# Altium PCB PCB.PcbDoc (part 2 of 2)
Units mm, origin at the board's own origin, x right, y up, seen from the top; angles counter-clockwise.
Board outline 99.99 x 64.99 mm, 4 copper layers (Top Layer 1, Top Layer, Bottom Layer, Bottom Layer 1), stack 1.483 mm thick; 158 components, 106 nets, 655 pads, 492 vias.
Unrouted connection lines stored in the file: 12.
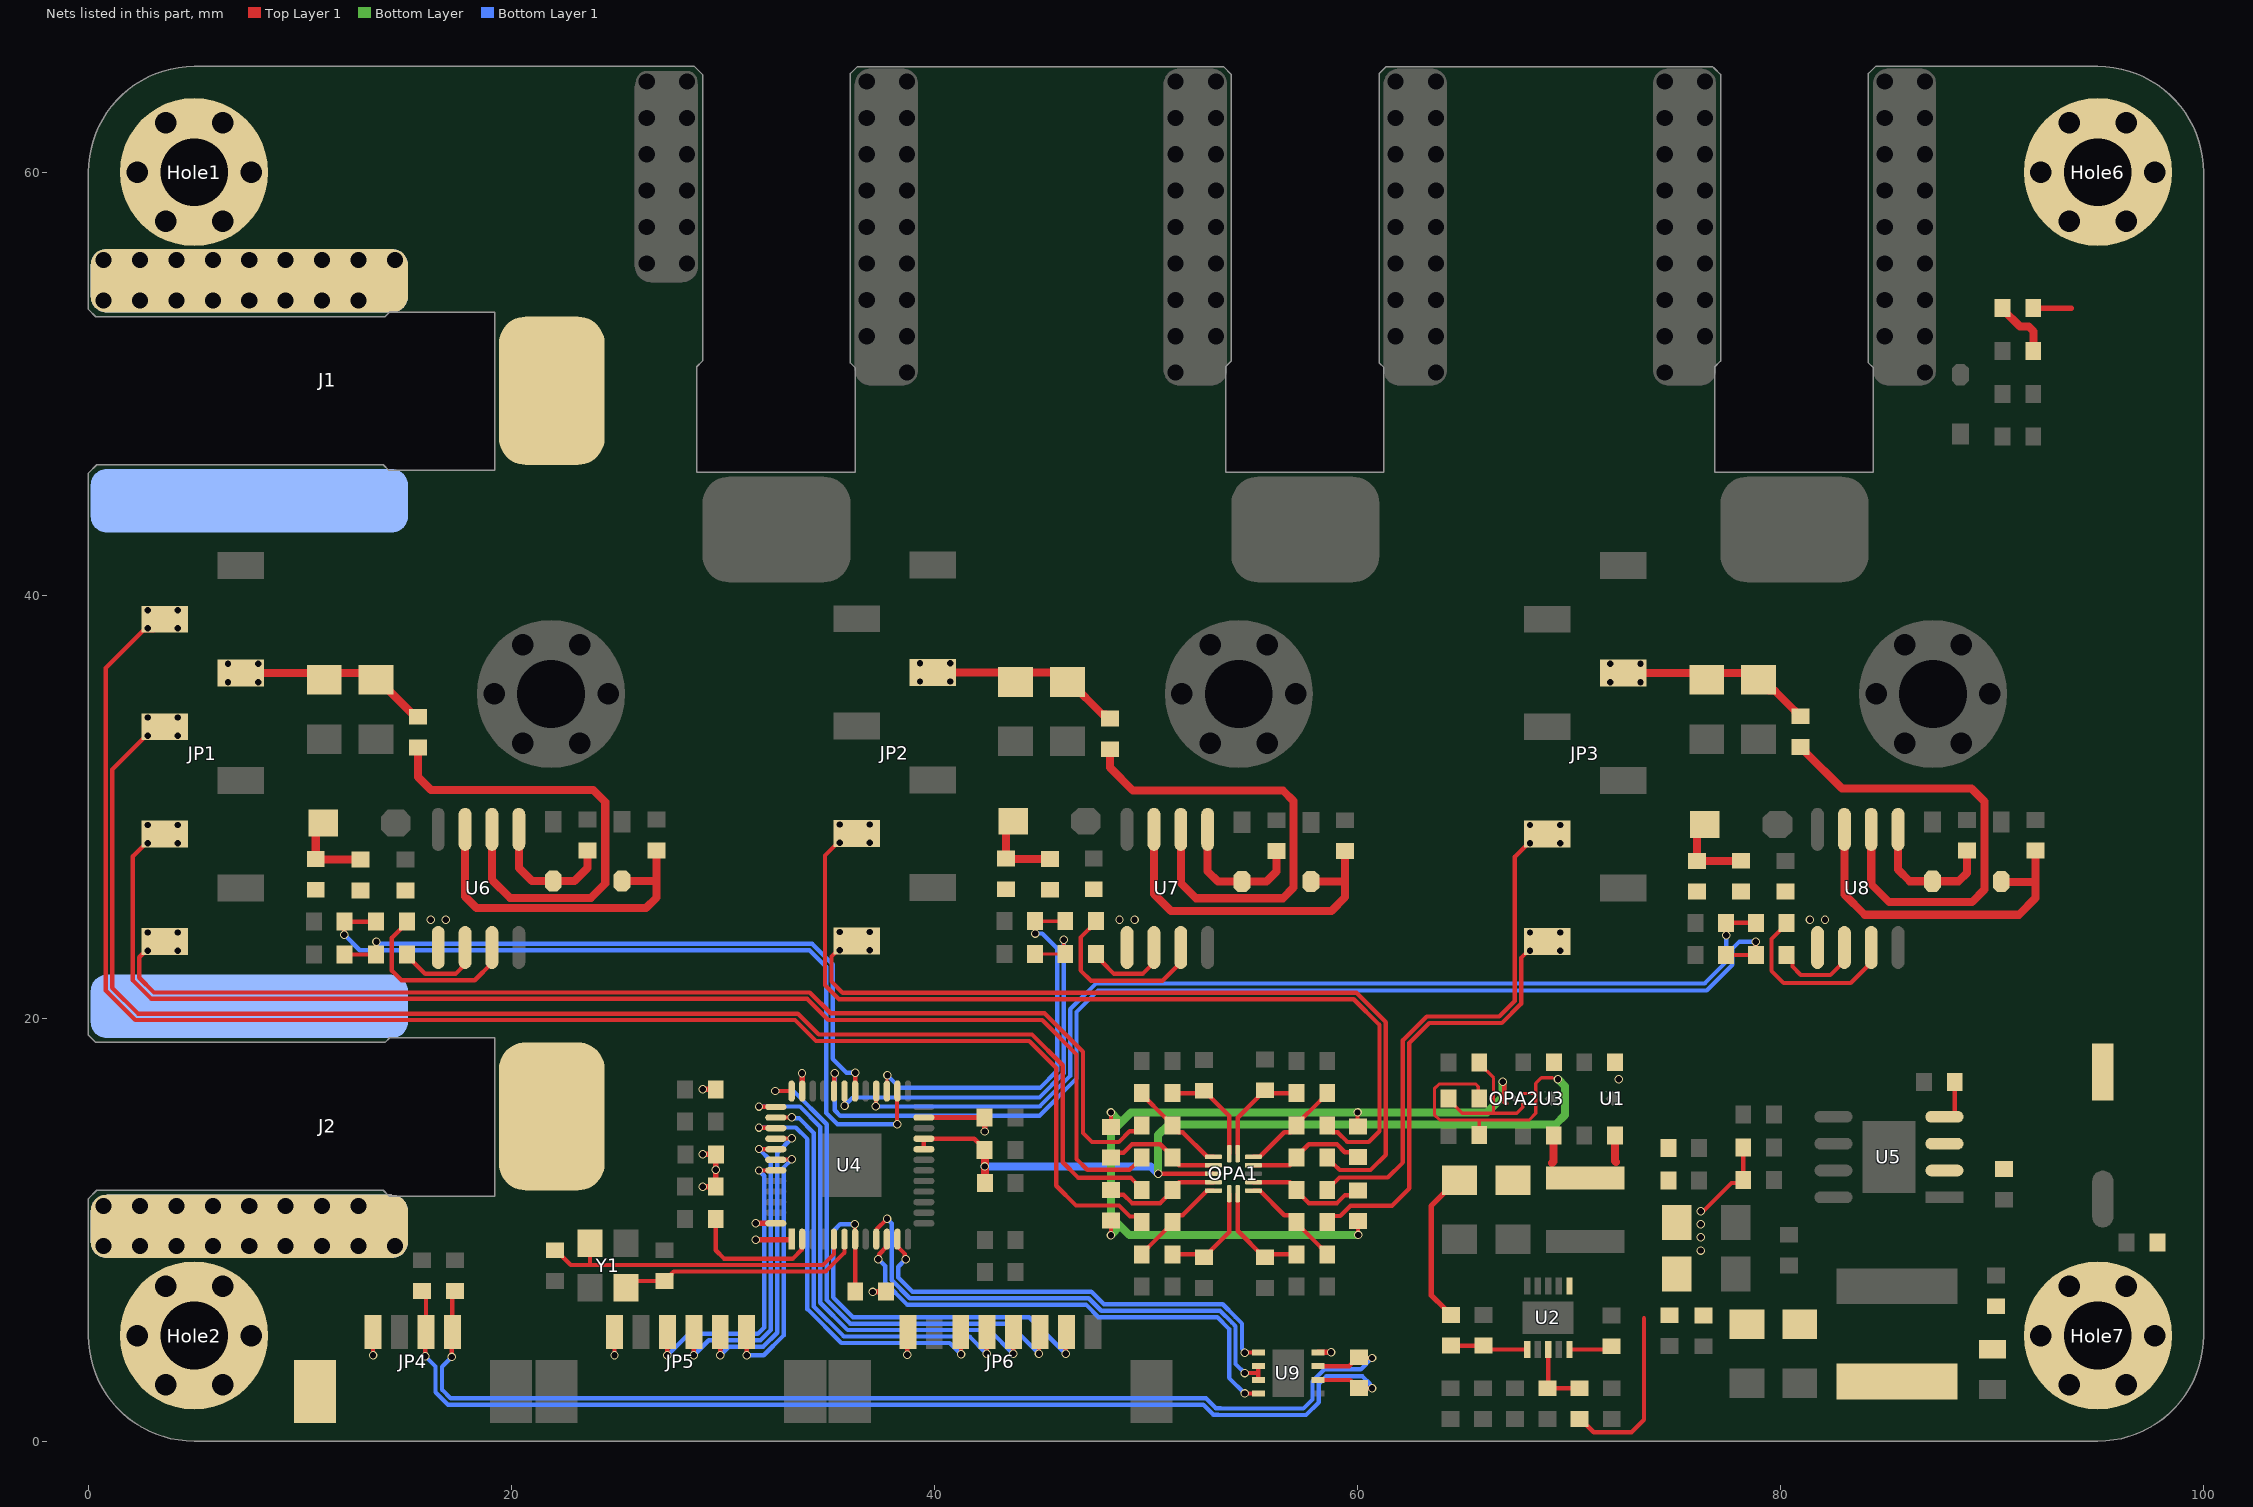
[diagram p4: the nets of this part, all layers, seen from the top]

## Via types
v1: diameter 0.4, hole 0.3, Top Layer 1 to Bottom Layer 1, tented both sides, 372 vias
v2: diameter 1, hole 0.711, Top Layer 1 to Bottom Layer 1, tented both sides, 120 vias

## Nets (pads, with @x,y where several pads share a name; then routed paths per layer and width w, separated by ;. In a path a pad name is that pad's centre, name@x,y a point inside that pad or via, vN(x,y) a via of type N, cw(c..) or ccw(c..) an arc to the next point about the centre after c; other vN are vias at no path point) (continued)
NetD1_1: D1.1 R7.2 R15.2 | length 4
  Top Layer 1 w0.381: D1.1@11.1,29.224 10.744,28.868 R15.2@10.744,27.522 10.757,27.509 12.84,27.509 R7.2@12.852,27.497
NetD2_1: D2.1 R14.2 R16.2 | length 4
  Top Layer 1 w0.381: D2.1@43.726,29.312 43.383,28.969 R16.2@43.383,27.547 43.396,27.535 45.453,27.535 R14.2@45.466,27.522
NetD3_2: D3.2 R21.1 U6.7 | length 16.5
  Top Layer 1 w0.381: U6.7@17.805,28.931 17.805,25.756 18.35,25.211 26.361,25.211 26.848,25.698 26.848,26.441 ; D3.2@25.222,26.486 26.803,26.486 26.848,26.441 ; R21.1@26.848,27.938 26.848,26.441
NetD4_2: D4.2 R22.1 U7.7 | length 16.5
  Top Layer 1 w0.381: U7.7@50.368,28.931 50.368,25.876 51.174,25.07 58.756,25.07 59.411,25.725 59.411,26.467 ; D4.2@57.785,26.461 59.405,26.461 59.411,26.467 ; R22.1@59.411,27.912 59.411,26.467
NetD5_2: D5.2 R29.1 U6.5 | length 6.4
  Top Layer 1 w0.381: U6.5@20.345,28.931 20.345,27.102 20.961,26.486 D5.2@21.971,26.486 22.981,26.486 23.597,27.102 R29.1@23.597,27.938
NetD6_2: D6.2 R30.1 U7.5 | length 6.6
  Top Layer 1 w0.381: U7.5@52.908,28.931 52.908,26.949 53.394,26.464 D6.2@54.534,26.464 55.684,26.464 56.159,26.939 R30.1@56.159,27.912
NetD7_1: D7.1 R31.2 R61.2 | length 4
  Top Layer 1 w0.381: D7.1@76.418,29.159 76.05,28.791 R31.2@76.05,27.434 76.056,27.44 78.125,27.44 R61.2@78.13,27.446
NetD8_2: D8.2 R34.1 U8.7 | length 16.7
  Top Layer 1 w0.381: U8.7@83.009,28.931 83.009,25.855 83.972,24.892 91.262,24.892 92.05,25.679 92.05,26.441 ; D8.2@90.424,26.472 90.455,26.441 92.05,26.441 ; R34.1@92.05,27.924 92.05,26.441
NetD9_2: D9.2 R38.1 U8.5 | length 6.6
  Top Layer 1 w0.381: U8.5@85.549,28.931 85.549,27.023 86.098,26.475 88.405,26.475 88.798,26.869 R38.1@88.798,27.924
NetOPA1_1: OPA1.1 R42.1 R43.1 | length 4.7
  Top Layer 1 w0.203: R43.1@49.796,16.459 49.796,16.409 50.946,15.259 50.972,15.259 51.246,14.985 R42.1@51.246,14.935 51.246,14.885 51.519,14.612 51.725,14.612 52.887,13.449 OPA1.1@53.182,13.449
NetOPA1_2: OPA1.2 R39.1 R40.1 | length 5.6
  Top Layer 1 w0.203: R39.1@48.336,13.411 48.564,13.639 48.933,13.639 49.334,14.039 50.667,14.039 51.246,13.461 R40.1@51.246,13.411 51.246,13.361 51.558,13.049 OPA1.2@53.182,13.049
NetOPA1_4: OPA1.4 R44.1 R45.1 | length 5.6
  Top Layer 1 w0.203: R44.1@48.336,11.887 48.564,11.66 48.933,11.66 49.334,11.259 50.667,11.259 51.246,11.837 R45.1@51.246,11.887 51.246,11.937 51.558,12.249 OPA1.4@53.182,12.249
NetOPA1_5: OPA1.5 R47.1 R48.1 | length 4.7
  Top Layer 1 w0.203: R48.1@49.796,8.839 49.796,8.889 50.069,9.163 50.095,9.163 51.246,10.313 R47.1@51.246,10.363 51.246,10.413 51.519,10.687 51.725,10.687 52.887,11.849 OPA1.5@53.182,11.849
NetOPA1_6: OPA1.6 R46.2 R48.2 | length 5.1
  Top Layer 1 w0.203: R48.2@51.246,8.839 52.642,8.839 52.78,8.701 53.054,8.974 53.054,9.024 53.927,9.898 OPA1.6@53.927,11.704
NetOPA1_7: OPA1.7 R51.2 R53.2 | length 5.1
  Top Layer 1 w0.203: OPA1.7@54.327,11.704 54.327,9.949 55.576,8.701 55.715,8.839 R53.2@57.111,8.839
NetOPA1_8: OPA1.8 R52.1 R53.1 | length 4.8
  Top Layer 1 w0.203: OPA1.8@55.072,11.849 55.367,11.849 56.53,10.687 56.837,10.687 57.111,10.413 R52.1@57.111,10.363 57.111,10.313 58.261,9.163 58.287,9.163 58.561,8.889 R53.1@58.561,8.839
NetOPA1_9: OPA1.9 R49.1 R50.1 | length 5.7
  Top Layer 1 w0.203: OPA1.9@55.072,12.249 56.799,12.249 57.111,11.937 R50.1@57.111,11.887 57.111,11.837 57.689,11.259 59.02,11.259 59.398,11.637 59.795,11.637 R49.1@60.02,11.862
NetOPA1_11: OPA1.11 R54.1 R55.1 | length 5.7
  Top Layer 1 w0.203: OPA1.11@55.072,13.049 56.799,13.049 57.111,13.361 57.111,13.461 57.689,14.039 59.02,14.039 59.391,13.669 59.788,13.669 R54.1@60.02,13.437
NetOPA1_12: OPA1.12 R57.1 R58.1 | length 4.8
  Top Layer 1 w0.203: OPA1.12@55.072,13.449 55.367,13.449 56.53,14.612 56.837,14.612 57.111,14.885 R57.1@57.111,14.935 57.111,14.985 58.261,16.136 58.287,16.136 58.561,16.409 R58.1@58.561,16.459
NetOPA1_13: OPA1.13 R56.2 R58.2 | length 5.1
  Top Layer 1 w0.203: OPA1.13@54.327,13.594 54.327,15.299 55.303,16.274 55.303,16.324 55.576,16.598 R56.2@55.626,16.598 55.765,16.459 R58.2@57.111,16.459
NetOPA1_14: OPA1.14 R41.2 R43.2 | length 5
  Top Layer 1 w0.203: R43.2@51.246,16.459 52.617,16.459 R41.2@52.73,16.572 52.78,16.572 53.054,16.299 53.054,16.249 53.927,15.375 OPA1.14@53.927,13.594
NetOPA2_4: OPA2.4 R59.2 R60.1 | length 6.8
  Top Layer 1 w0.152: R59.2@64.299,16.205 64.299,16.155 64.947,15.507 66.235,15.507 66.302,15.507 66.427,15.507 ; R60.1@65.749,17.907 65.749,17.857 66.427,17.179 66.427,15.507 ; OPA2.4@67.802,15.965 67.802,15.785 67.524,15.507 66.427,15.507
NetR2_1: R2.1 U5.4 | length 2
  Top Layer 1 w0.203: U5.4@87.74,15.342 88.068,15.342 88.228,15.502 R2.1@88.228,16.993
NetR3_2: R3.2 R4.1 | length 2.9
  Top Layer 1 w0.381: R3.2@90.486,53.569 90.486,53.519 91.306,52.698 91.725,52.698 91.948,52.475 91.948,51.548 R4.1@91.936,51.537
NetR8_2: R8.2 R11.1 U2.8 | length 3.3
  Top Layer 1 w0.203: U2.8@69.012,4.292 69.012,2.556 R11.1@68.964,2.508 R8.2@70.488,2.508
NetR12_1: R12.1 U2.10 | length 2.1
  Top Layer 1 w0.203: U2.10@70.012,4.339 71.852,4.339 R12.1@72.009,4.496
NetR19_2: R19.2 U6.2 | length 4.1
  Top Layer 1 w0.203: R19.2@15.051,23.012 15.051,22.962 15.324,22.689 15.331,22.689 15.922,22.098 17.348,22.098 17.805,22.555 U6.2@17.805,23.343
NetR20_2: R20.2 U7.2 | length 4.1
  Top Layer 1 w0.203: R20.2@47.627,23.038 47.901,22.764 47.901,22.682 48.485,22.098 49.835,22.098 50.368,22.631 U7.2@50.368,23.343
NetR23_1: R23.1 U6.6 | length 23
  Top Layer 1 w0.381: R23.1@15.57,32.803 15.57,31.411 16.188,30.793 23.863,30.793 24.43,30.226 24.43,26.363 23.76,25.694 19.924,25.694 19.075,26.543 U6.6@19.075,28.931
NetR24_1: R24.1 U7.6 | length 22.7
  Top Layer 1 w0.381: R24.1@48.285,32.715 48.285,31.852 49.381,30.756 56.48,30.756 56.972,30.264 56.972,26.18 56.464,25.672 52.363,25.672 51.638,26.397 U7.6@51.638,28.931
NetR25_2: R25.2 U6.3 | length 8.6
  Top Layer 1 w0.203: R25.2@15.051,24.562 15.051,24.512 14.339,23.8 14.339,22.252 14.797,21.793 18.263,21.793 19.075,22.606 U6.3@19.075,23.343
NetR26_2: R26.2 U7.3 | length 8.6
  Top Layer 1 w0.203: R26.2@47.627,24.587 47.627,24.537 46.902,23.812 46.902,22.262 47.396,21.768 50.775,21.768 51.638,22.631 U7.3@51.638,23.343
NetR33_2: R33.2 U8.2 | length 4.2
  Top Layer 1 w0.203: R33.2@80.28,22.987 80.553,22.714 80.553,22.444 80.95,22.047 82.347,22.047 83.009,22.71 U8.2@83.009,23.343
NetR35_1: R35.1 U8.6 | length 22.5
  Top Layer 1 w0.381: R35.1@80.924,32.828 80.974,32.828 81.159,32.644 81.159,32.594 82.892,30.861 89.027,30.861 89.637,30.251 89.637,26.086 89.037,25.486 85.131,25.486 84.279,26.338 U8.6@84.279,28.931
NetR36_2: R36.2 U8.3 | length 7.9
  Top Layer 1 w0.203: R36.2@80.28,24.511 80.28,24.461 79.563,23.744 79.563,22.24 80.137,21.666 83.312,21.666 84.252,22.606 U8.3@84.277,22.606
NRST: JP6.7 R64.2 U4.7 | length 20.6
  Top Layer 1 w0.203: v1(36.226,10.266) 36.234,10.258 36.234,9.563 U4.7@36.242,9.556 36.242,7.167 R64.2@36.297,7.112 ; v1(46.203,4.14) 46.203,5.133 JP6.7@46.235,5.166
  Bottom Layer 1 w0.203: v1(36.226,10.266) 35.539,10.266 35.204,9.931 35.204,6.805 36.142,5.867 44.475,5.867 v1(46.203,4.14)
PGND: Hole2.1 J2.1 JP4.0@10.71,2.355
RS485_A: C40.2 JP4.3 R62.1 U9.6 | length 54
  Top Layer 1 w0.203: C40.2@15.773,7.112 15.953,6.933 JP4.3@15.953,5.166 15.926,5.139 v1(15.926,4.013) ; U9.6@58.131,2.901 59.647,2.901 R62.1@59.995,2.552 ; R62.1@60.071,2.526 60.083,2.515 v1(60.681,2.515)
  Bottom Layer 1 w0.203: v1(15.926,4.013) 15.926,4.011 16.405,3.532 16.405,2.316 16.994,1.727 52.706,1.727 53.172,1.261 53.4,1.261 53.416,1.245 57.56,1.245 58.165,1.85 58.165,2.718 58.515,3.068 60.233,3.068 60.582,2.719 60.582,2.666 60.681,2.568 v1(60.681,2.515)
RS485_B: C39.1 JP4.4 R62.2 U9.7 | length 53.4
  Top Layer 1 w0.203: v1(17.17,3.988) 17.17,5.133 JP4.4@17.203,5.166 17.203,6.992 C39.1@17.323,7.112 ; U9.7@58.131,3.551 59.596,3.551 59.906,3.861 R62.2@60.046,3.861 ; R62.2@60.071,3.976 60.11,3.937 v1(60.681,3.937)
  Bottom Layer 1 w0.203: v1(17.17,3.988) 17.17,3.985 16.709,3.524 16.709,2.442 17.12,2.032 52.832,2.032 53.298,1.566 53.526,1.566 53.542,1.55 57.434,1.55 57.86,1.976 57.86,2.845 58.425,3.409 60.153,3.409 v1(60.681,3.937)
Shunt_BusH: JP1.5 R45.2 | length 69
  Top Layer 1 w0.203: JP1.5@3.607,33.782 3.142,33.782 1.12,31.76 1.12,21.435 2.337,20.218 33.528,20.218 34.519,19.228 44.603,19.228 46.057,17.774 46.057,13.193 46.784,12.465 49.267,12.465 49.796,11.937 R45.2@49.796,11.887
  other v1: 2.794,33.35 4.219,33.35 2.794,34.214 4.219,34.214
Shunt_BusL: JP1.7 R47.2 | length 75.8
  Top Layer 1 w0.203: JP1.7@3.607,38.862 3.073,38.329 2.591,38.329 0.815,36.553 0.815,21.309 1.372,20.752 2.211,19.914 33.402,19.914 34.393,18.923 44.476,18.923 45.752,17.647 45.752,17.393 ; 45.752,17.39 45.752,12.082 46.686,11.148 48.719,11.148 49.237,10.63 49.529,10.63 R47.2@49.796,10.363
  other v1: 2.794,38.43 4.219,38.43 2.794,39.294 4.219,39.294
Shunt_UH: JP1.3 R40.2 | length 62.4
  Top Layer 1 w0.203: JP1.3@3.607,28.702 3.142,28.702 2.098,27.658 2.098,21.79 2.721,21.166 2.973,20.914 33.976,20.914 34.977,19.914 45.085,19.914 46.711,18.288 46.711,13.339 47.217,12.833 49.217,12.833 49.472,13.088 49.522,13.088 49.796,13.361 R40.2@49.796,13.411
  other v1: 2.794,28.27 4.219,28.27 2.794,29.134 4.219,29.134
Shunt_UL: JP1.1 R42.2 | length 55.7
  Top Layer 1 w0.203: JP1.1@2.752,23.232 2.403,22.883 2.403,21.916 3.099,21.219 34.102,21.219 35.087,20.234 45.196,20.234 47.015,18.414 47.015,14.572 47.439,14.148 48.71,14.148 49.219,14.656 49.522,14.656 49.796,14.93 R42.2@49.796,14.985 ; v1(2.794,23.19) 3.175,23.19 JP1.1@3.607,23.622
  other v1: 4.219,23.19 2.794,24.054 4.219,24.054
Shunt_VH: JP2.1 R55.2 | length 39.3
  Top Layer 1 w0.203: JP2.1@36.322,23.647 35.857,23.647 35.123,22.914 35.123,21.733 35.653,21.203 59.944,21.203 61.333,19.813 61.333,13.549 60.607,12.822 59.15,12.822 58.884,13.088 58.834,13.088 58.561,13.361 R55.2@58.561,13.411
  other v1: 35.509,23.216 36.935,23.216 35.509,24.079 36.934,24.079
Shunt_VL: JP2.3 R57.2 | length 43.1
  Top Layer 1 w0.203: JP2.3@36.322,28.727 35.857,28.727 34.819,27.689 34.819,21.56 35.48,20.898 59.817,20.898 61.029,19.687 61.029,14.659 60.522,14.153 59.512,14.153 59.053,14.612 58.834,14.612 58.561,14.885 R57.2@58.561,14.935
  other v1: 35.509,28.296 36.935,28.296 35.509,29.159 36.934,29.159
Shunt_WH: JP3.3 R50.2 | length 24.8
  Top Layer 1 w0.203: R50.2@58.561,11.887 58.561,11.937 58.834,12.211 58.884,12.211 59.145,12.471 61.424,12.471 62.138,13.186 62.138,18.955 63.27,20.086 66.69,20.086 67.423,20.819 67.423,27.629 68.496,28.702 JP3.3@68.961,28.702
  other v1: 68.148,28.27 69.574,28.27 68.148,29.134 69.573,29.134
Shunt_WL: JP3.1 R52.2 | length 21.2
  Top Layer 1 w0.203: R52.2@58.561,10.363 58.561,10.381 58.834,10.655 59.176,10.655 59.66,11.139 61.624,11.139 62.443,11.958 62.443,18.829 63.385,19.771 66.817,19.771 67.728,20.682 67.728,22.854 68.496,23.622 JP3.1@68.961,23.622
  other v1: 68.148,23.19 69.574,23.19 68.148,24.054 69.573,24.054
SPI3_CS: JP5.3 U4.43 | length 14.5
  Top Layer 1 w0.203: v1(27.367,4.066) JP5.3@27.367,5.166 JP5.3@27.368,5.167 ; v1(31.699,12.802) 31.701,12.804 32.49,12.804 U4.43@32.492,12.806
  Bottom Layer 1 w0.203: v1(27.367,4.066) 28.379,5.078 31.642,5.078 31.947,5.383 31.947,12.553 v1(31.699,12.802)
SPI3_MISO: JP5.4 U4.41 | length 14.8
  Top Layer 1 w0.203: v1(28.617,4.066) JP5.4@28.617,5.166 JP5.4@28.618,5.167 ; v1(31.699,13.818) 31.705,13.812 32.486,13.812 U4.41@32.492,13.806
  Bottom Layer 1 w0.203: v1(28.617,4.066) 29.324,4.773 31.768,4.773 32.252,5.257 32.252,13.265 v1(31.699,13.818)
SPI3_MOSI: JP5.6 U4.42 | length 12.5
  Top Layer 1 w0.203: v1(31.115,4.064) 31.115,5.164 JP5.6@31.117,5.166 ; U4.42@32.492,13.306 32.507,13.32 33.234,13.32 v1(33.249,13.335)
  Bottom Layer 1 w0.203: v1(31.115,4.064) 31.921,4.064 32.862,5.004 32.862,12.948 v1(33.249,13.335)
SPI3_SCK: JP5.5 U4.40 | length 14.5
  Top Layer 1 w0.203: v1(29.867,4.066) JP5.5@29.867,5.166 JP5.5@29.867,5.166 ; U4.40@32.492,14.306 32.502,14.316 33.239,14.316 v1(33.249,14.326)
  Bottom Layer 1 w0.203: v1(29.867,4.066) 30.269,4.468 31.894,4.468 32.557,5.131 32.557,13.634 v1(33.249,14.326)
SumGND: C41.2 C42.2 Hole7.1 LB1.1
SWCLK: JP6.5 U4.37 | length 23.6
  Top Layer 1 w0.203: v1(31.699,15.824) 31.708,15.815 32.482,15.815 U4.37@32.492,15.806 ; v1(43.713,4.14) 43.713,5.144 JP6.5@43.735,5.166
  Bottom Layer 1 w0.203: v1(31.699,15.824) 33.63,15.824 34.595,14.859 34.595,6.552 35.889,5.258 42.596,5.258 v1(43.713,4.14)
SWDIO: JP6.6 U4.36 | length 24.3
  Top Layer 1 w0.203: v1(32.461,16.561) 33.237,16.561 U4.36@33.242,16.556 ; v1(44.933,4.14) 44.933,5.113 JP6.6@44.985,5.166
  Bottom Layer 1 w0.203: v1(32.461,16.561) 33.324,16.561 34.9,14.985 34.9,6.679 36.016,5.563 43.51,5.563 v1(44.933,4.14)
TIM1_BKIN: R65.2 U4.2 | length 6.4
  Top Layer 1 w0.203: R65.2@29.656,10.516 29.656,9.029 30.048,8.636 33.299,8.636 33.723,9.06 33.723,9.537 U4.2@33.742,9.556
TIM1_CH1: R17.1 R19.1 U4.30 | length 30.8
  Top Layer 1 w0.203: R17.1@12.104,23.012 R19.1@13.601,23.012 13.614,23.026 v1(13.614,23.622) ; U4.30@36.242,16.556 36.244,16.558 36.244,17.422 v1(36.246,17.424)
  Bottom Layer 1 w0.203: v1(13.614,23.622) 13.668,23.622 13.767,23.523 34.211,23.523 35.179,22.555 35.179,18.085 35.839,17.424 v1(36.246,17.424)
TIM1_CH1N: R25.1 R27.2 U4.26 | length 37.6
  Top Layer 1 w0.203: v1(12.09,23.952) 12.09,24.548 R27.2@12.104,24.562 R25.1@13.601,24.562 ; v1(38.227,14.988) 38.227,16.541 U4.26@38.242,16.556
  Bottom Layer 1 w0.203: v1(12.09,23.952) 12.825,23.218 34.085,23.218 34.874,22.429 34.874,15.519 35.405,14.988 v1(38.227,14.988)
TIM1_CH2: R18.1 R20.1 U4.31 | length 20.1
  Top Layer 1 w0.152: v1(35.742,15.867) U4.31@35.742,16.556 ; R18.1@44.755,23.038 R20.1@46.177,23.038 46.101,23.114 v1(46.101,23.708)
  Bottom Layer 1 w0.203: v1(35.742,15.867) 36.131,16.256 44.958,16.256 46.101,17.399 v1(46.101,23.708)
TIM1_CH2N: R26.1 R28.2 U4.27 | length 18.5
  Top Layer 1 w0.152: U4.27@37.742,16.556 37.756,16.57 37.756,17.283 v1(37.77,17.297) ; v1(44.755,24.003) R28.2@44.755,24.587 R26.1@46.177,24.587
  Bottom Layer 1 w0.203: v1(37.77,17.297) 38.359,16.708 44.979,16.708 45.796,17.525 45.796,23.292 45.085,24.003 v1(44.755,24.003)
TIM1_CH3: R32.1 R33.1 U4.32 | length 54
  Top Layer 1 w0.203: U4.32@35.242,16.556 35.26,16.574 35.26,17.379 v1(35.281,17.399) ; R32.1@77.421,22.987 R33.1@78.83,22.987 78.816,23.001 v1(78.816,23.622)
  Bottom Layer 1 w0.203: v1(35.281,17.399) 35.281,15.646 35.535,15.392 44.957,15.392 46.711,17.146 46.711,20.295 47.725,21.31 76.504,21.31 77.724,22.531 77.724,23.292 78.054,23.622 v1(78.816,23.622)
TIM1_CH3N: R36.1 R37.2 U4.28 | length 48.9
  Top Layer 1 w0.203: v1(37.216,15.831) 37.229,15.844 37.229,16.543 U4.28@37.242,16.556 ; v1(77.419,23.927) 77.419,24.509 R37.2@77.421,24.511 R36.1@78.83,24.511
  Bottom Layer 1 w0.203: v1(37.216,15.831) 44.964,15.831 46.406,17.273 46.406,20.422 47.625,21.641 76.403,21.641 77.419,22.657 v1(77.419,23.927)
UART4_RX: JP6.3 U4.39 | length 20.6
  Top Layer 1 w0.203: v1(31.699,14.834) 31.713,14.82 32.478,14.82 U4.39@32.492,14.806 ; JP6.3@41.235,5.166 41.25,5.151 v1(41.25,4.115)
  Bottom Layer 1 w0.203: v1(31.699,14.834) 33.436,14.834 33.985,14.284 33.985,6.248 35.585,4.648 40.716,4.648 v1(41.25,4.115)
UART4_TX: JP6.4 U4.38 | length 20.4
  Top Layer 1 w0.203: U4.38@32.492,15.306 32.497,15.311 33.243,15.311 v1(33.249,15.316) ; v1(42.469,4.14) 42.469,5.149 JP6.4@42.485,5.166
  Bottom Layer 1 w0.203: v1(33.249,15.316) 33.286,15.279 33.59,15.279 34.29,14.579 34.29,6.375 35.712,4.953 41.656,4.953 v1(42.469,4.14)
USART2_DE: U4.9 U9.2 U9.3 | length 25
  Top Layer 1 w0.203: U4.9@37.242,9.556 37.26,9.574 37.26,10.022 v1(37.753,10.514) ; v1(54.661,3.226) 55.28,3.226 55.306,3.251 ; U9.3@55.245,2.921 55.288,2.921 55.306,2.939 55.306,3.251 ; U9.2@55.306,3.551 55.306,3.251
  Bottom Layer 1 w0.203: v1(37.753,10.514) 37.973,10.294 37.973,7.619 38.827,6.766 47.286,6.766 47.879,6.172 53.493,6.172 54.077,5.588 54.229,5.436 54.229,3.658 v1(54.661,3.226)
USART2_RX: U4.11 U9.1 | length 21.4
  Top Layer 1 w0.203: U4.11@38.242,9.556 38.242,9.206 38.596,8.852 38.596,8.648 v1(38.633,8.611) ; v1(54.661,4.191) 54.666,4.196 55.301,4.196 U9.1@55.306,4.201
  Bottom Layer 1 w0.203: v1(38.633,8.611) 38.278,8.255 38.278,7.746 38.953,7.07 47.412,7.07 48.005,6.477 53.619,6.477 54.204,5.893 54.534,5.563 54.534,4.371 54.661,4.244 v1(54.661,4.191)
USART2_TX: U4.10 U9.4 | length 23.5
  Top Layer 1 w0.203: v1(37.343,8.61) 37.381,8.648 37.381,8.845 37.742,9.206 U4.10@37.742,9.556 ; v1(54.661,2.261) 54.666,2.256 55.301,2.256 U9.4@55.306,2.251
  Bottom Layer 1 w0.203: v1(37.343,8.61) 37.668,8.285 37.668,7.493 38.7,6.461 47.159,6.461 47.753,5.867 53.367,5.867 53.924,5.31 53.924,2.997 v1(54.661,2.261)
VBUS: C2.2 E1.1 Hole1.1 Hole6.1 J1.1 R3.1 U5.2 U5.3 | length 1.8
  Top Layer 1 w0.254: R3.1@91.936,53.569 93.726,53.569
VCC3.3V: C8.1 C43.2 C44.2 C45.2 C46.2 JP4.1 JP5.1 JP6.1 R64.1 U1.1 U4.1 U4.23 U4.35 U4.48 U9.8 | length 15.3
  Top Layer 1 w0.203: v1(13.453,4.066) JP4.1@13.453,5.166 JP4.1@13.454,5.167 ; v1(24.867,4.066) JP5.1@24.867,5.166 JP5.1@24.868,5.167 ; v1(38.71,4.089) 38.71,5.14 JP6.1@38.735,5.166
  Top Layer 1 w0.254: v1(29.035,12.04) C44.2@29.656,12.04 ; v1(29.035,16.637) C45.2@29.656,16.637 ; v1(29.046,13.564) C43.2@29.667,13.564 29.654,13.551 v1(29.654,12.84) C44.2@29.656,12.04 ; v1(31.543,9.525) 33.219,9.525 33.242,9.548 U4.1@33.242,9.556 ; v1(31.543,10.312) 31.547,10.309 32.488,10.309 U4.48@32.492,10.306 ; v1(33.731,17.399) 33.737,17.394 33.737,16.561 U4.35@33.742,16.556 ; v1(37.075,7.061) 37.67,7.061 R64.1@37.696,7.087 ; U4.23@39.492,15.306 42.357,15.306 C46.2@42.367,15.316 v1(42.367,14.646) ; U9.8@58.131,4.201 58.139,4.209 v1(58.742,4.209) ; C8.1@72.164,17.919 C8.1@72.385,17.698
  other v1: 72.339,17.12
VCC5V: C9.2 C15.2 C16.2 C17.2 C18.2 C22.2 L2.2 R10.1 U1.3 U1.4 U3.3 U3.4 | length 9.9
  Top Layer 1 w0.254: R10.1@64.414,5.971 64.364,5.971 64.116,6.219 64.116,6.269 63.475,6.911 63.475,11.123 64.696,12.344 C16.2@64.821,12.344 ; C22.2@69.268,14.465 C22.2@69.494,14.238
  Top Layer 1 w0.381: 69.19,13.157 69.266,13.233 69.266,13.995 ; C9.2@72.164,14.465 72.164,13.257 72.212,13.208
VCC12V: C3.2 C4.2 C5.2 C6.2 C7.2 C11.2 C12.2 C29.2 C30.2 C33.2 L1.2 R1.1 R7.1 R8.1 R14.1 R15.1 R16.1 R31.1 R61.1 U2.1 U6.1 U7.1 U8.1 | length 12.5
  Top Layer 1 w0.203: R8.1@70.488,1.058 70.538,1.058 71.165,0.432 72.949,0.432 73.533,1.016 73.533,5.817 ; v1(76.225,10.871) 76.263,10.909 76.369,10.909 77.669,12.209 78.095,12.209 C7.2@78.23,12.344 78.23,12.859 R1.1@78.23,13.894
  other v1: 76.225,9.017 76.225,9.652 76.225,10.262 16.178,24.663 16.889,24.663 48.74,24.663 49.452,24.663 81.382,24.663 82.093,24.663
VCCA1.65V: OPA2.1 OPA2.2 R39.2 R44.2 R49.2 R54.2 | length 40.9
  Top Layer 1 w0.203: v1(48.336,9.749) R44.2@48.336,10.437 ; R39.2@48.336,14.861 v1(48.336,15.545) ; v1(59.995,15.545) 59.995,14.912 R54.2@60.02,14.887 ; v1(60.02,9.754) R49.2@60.02,10.412 ; v1@66.853,16.939 v1@66.853,16.966 ; v1(66.853,16.993) v1@66.853,16.966 ; OPA2.2@67.022,15.965 66.931,16.056 66.931,16.888 v1@66.853,16.966
  Bottom Layer w0.381: v1(48.336,15.545) 48.704,15.176 ; v1@48.344,9.749 48.766,10.187 ; v1(60.02,9.754) 60.017,9.75 59.961,9.75 59.959,9.749 49.205,9.749 48.766,10.187 ; v1(66.853,16.993) 66.849,16.989 66.849,16.273 66.121,15.545 v1(59.995,15.545) 49.285,15.545 48.336,14.596 48.336,10.617 48.766,10.187
VCCA3.3V: C19.1 C38.2 C47.2 C48.2 OPA1.3 OPA2.5 R59.1 U3.1 U4.20 U4.21 | length 52.1
  Top Layer 1 w0.152: C38.2@65.749,14.478 65.749,15.189 ; R59.1@65.749,16.205 65.704,16.25 65.704,16.77 65.583,16.891 63.856,16.891 63.627,16.662 63.627,15.443 63.88,15.19 68.114,15.19 68.422,15.499 68.422,16.445 ; OPA2.5@67.802,16.445 68.422,16.445 ; 69.213,17.183 68.686,17.183 68.422,16.92 68.422,16.445
  Top Layer 1 w0.203: U4.20@39.492,13.806 U4.20@39.492,13.868 ; U4.20@39.497,13.868 39.492,13.874 U4.21@39.492,14.306 41.878,14.306 C48.2@42.239,13.945 ; C47.2@42.24,12.09 C47.2@42.367,12.217 ; v1(50.566,12.649) OPA1.3@53.182,12.649
  Top Layer 1 w0.381: C48.2@42.367,13.767 42.373,13.761 42.373,12.223 C47.2@42.379,12.217
  Bottom Layer w0.381: v1(50.566,12.649) 50.566,14.472 51.079,14.986 69.367,14.986 69.805,15.424 69.805,16.783 v1(69.469,17.12)
  Bottom Layer 1 w0.381: v1(42.367,12.992) 50.218,12.992 50.561,12.649 v1(50.566,12.649)
VS_U: C25.1 C27.1 JP1.6 R23.2 | length 9.2
  Top Layer 1 w0.381: JP1.6@7.207,36.322 13.258,36.322 C25.1@13.585,35.995 13.71,35.995 15.267,34.438 15.386,34.438 R23.2@15.57,34.253
  other v1: 6.594,35.89 8.02,35.89 6.595,36.754 8.02,36.754
VS_V: C26.1 C28.1 JP2.6 R24.2 | length 9.3
  Top Layer 1 w0.381: JP2.6@39.922,36.347 40.735,36.347 43.815,36.347 45.828,36.347 C28.1@46.279,35.896 46.404,35.896 47.95,34.35 48.101,34.35 R24.2@48.285,34.165
  other v1: 39.31,35.916 40.735,35.916 39.31,36.779 40.735,36.779
VS_W: C31.1 C32.1 JP3.6 R35.2 | length 9.2
  Top Layer 1 w0.381: JP3.6@72.561,36.322 78.616,36.322 C31.1@78.943,35.995 79.453,35.485 79.718,35.485 80.69,34.513 80.69,34.463 80.874,34.278 R35.2@80.924,34.278
  other v1: 71.949,35.89 73.374,35.89 71.949,36.754 73.374,36.754
VSENSE-A: R10.2 R13.1 U2.6 | length 3.7
  Top Layer 1 w0.203: R10.2@64.414,4.521 R13.1@65.938,4.521 66.121,4.339 U2.6@68.012,4.339
XIN: C24.1 U4.5 Y1.3 | length 15.4
  Top Layer 1 w0.203: C24.1@22.047,9.031 22.097,9.031 22.797,8.331 23.712,8.331 ; Y1.3@23.712,9.356 23.712,8.331 ; U4.5@35.242,9.556 35.242,8.851 34.722,8.331 23.712,8.331
XOUT: C23.1 U4.6 Y1.1 | length 11.7
  Top Layer 1 w0.203: Y1.1@25.412,7.256 25.737,7.581 27.279,7.581 27.552,7.854 27.552,7.904 27.674,8.026 34.848,8.026 35.742,8.92 U4.6@35.742,9.556
pads on no net: JP1.2 JP2.2 JP2.5 JP2.7 JP3.2 JP3.5 JP3.7 JP6.8 U4.3 U4.4 U4.12 U4.19 U4.22 U4.24 U4.25 U4.29 U4.33 U4.34 U4.44 U4.45 U4.47 U5.6 U5.10 U5.11
copper on no net: | length 1
  Top Layer 1 w0.203: 47.485,5.166 47.498,5.153 v1(47.498,4.14)
  other v1: 6.594,25.73 8.02,25.73 71.949,25.73 73.374,25.73 39.31,25.756 40.735,25.756 6.595,26.594 8.02,26.594 71.949,26.594 73.374,26.594 39.31,26.619 40.735,26.619 68.148,33.35 69.574,33.35 35.509,33.376 36.935,33.376 68.148,34.214 69.573,34.214 35.509,34.239 36.934,34.239 68.148,38.43 69.574,38.43 35.509,38.456 36.935,38.456 68.148,39.294 69.573,39.294 35.509,39.319 36.934,39.319

## Polygon pours and split planes (outlines as drawn)
GND on Top Layer "GND_L02_P009" (solid, remove dead copper, pour order 9): 15.824,8.992 15.824,10.77 16.459,11.405 23.753,11.405 24.841,12.493 24.841,18.415 23.724,19.533 9.398,19.533 8.407,20.523 8.407,28.88 9.525,29.997 33.884,29.997 35.103,28.778 35.103,21.971 35.839,21.234 40.31,21.234 41.097,22.022 41.097,28.931 42.164,29.997 66.954,29.997 67.767,29.185 67.767,22.149 68.682,21.234 72.898,21.234 73.762,22.098 73.762,29.337 74.422,29.997 98.984,29.997 99.599,29.382 99.599,9.556 98.806,8.763 93.066,8.763 91.161,6.858 91.161,3.353 92.405,2.108 92.405,0.965 91.834,0.394 13.576,0.394 12.725,1.245 12.725,5.893
AGND on Top Layer "AGND_L02_P004" (solid, remove dead copper, pour order 4): 43.536,13.614 43.536,7.391 44.323,6.604 63.043,6.604 63.551,7.112 63.551,8.534 64.16,9.144 65.151,9.144 65.684,9.677 65.684,17.805 64.795,18.694 48.59,18.694 47.854,17.958 45.593,17.958 44.374,16.739 44.374,14.453
VCC3.3V on Bottom Layer "VCC3.3V_L03_P005" (solid, remove dead copper, pour order 5): 73.076,18.948 73.685,18.339 73.685,1.499 72.212,0.025 13.487,0.025 12.649,0.864 12.649,5.918 14.58,7.849 15.85,9.119 15.85,10.516 16.51,11.176 24.079,11.176 25.07,12.167 25.07,18.11 25.908,18.948
VCC12V on Bottom Layer "VCC12V_L03_P001" (solid, remove dead copper, pour order 1): 15.875,24.867 15.596,24.587 15.596,19.507 15.951,19.152 73.203,19.152 73.889,18.466 73.889,9.296 74.397,8.788 81.94,8.788 82.423,9.271 82.423,24.613 82.169,24.867 72.517,24.867 72.212,24.562 72.212,22.352 71.552,21.692 68.402,21.692 51.029,21.692 50.749,21.971 50.749,24.587 50.47,24.867 48.565,24.867 48.311,24.613 48.311,22.022 47.981,21.692 18.491,21.692 18.212,21.971 18.212,24.511 17.856,24.867

## Other copper
Top Layer 1:
  region net VCCA3.3V: 69.672,16.289 69.672,16.768 69.672,18.364 69.621,18.415 68.91,18.415 68.859,18.364 68.859,17.101
  region net VCC3.3V: 71.755,18.415 71.704,18.364 71.704,17.399 71.87,17.233 72.223,16.88 72.223,16.73 72.223,16.63 72.542,16.311 72.542,18.339 72.466,18.415
  region net VCC5V: 71.647,16.03 72.005,15.672 72.115,15.672 72.473,16.03 72.523,16.03 72.523,14.955 72.568,14.91 72.568,14.021 72.542,13.995 71.831,13.995 71.755,14.072 71.755,15.062 71.597,15.22 71.597,16.03
  region net VCC5V: 68.707,16.027 68.707,15.011 68.859,14.859 68.859,14.046 68.91,13.995 69.621,13.995 69.723,14.097 69.723,15.646 69.633,15.737 69.633,16.027 69.582,16.027 69.226,15.672 69.113,15.672 68.757,16.027
  region net NetC10_1: 69.372,6.934 69.653,6.934 69.68,6.961 69.68,7.844 69.863,8.026 72.517,8.026 72.796,8.306 72.796,10.16 72.619,10.338 68.656,10.338 68.529,10.211 68.529,8.306 68.809,8.026 69.164,8.026 69.319,7.871 69.319,6.987
  region net PGND: 0.533,11.659 0.102,11.227 0.102,4.801 3.404,1.499 11.125,1.499 12.217,2.591 12.217,6.121 15.101,9.005 15.101,11.225 14.668,11.659
  region net Motor-V: 50.876,32.537 51.587,31.826 60.833,31.826 61.392,32.385 61.392,44.526 60.3,45.618 51.892,45.618 50.876,44.602
  region net Motor-W: 77.902,45.618 77.159,44.875 77.159,41.332 77.876,40.615 81.915,40.615 83.693,38.837 83.693,32.944 84.811,31.826 90.881,31.826 91.872,32.817 91.872,44.323 90.576,45.618
  region net GND: 77.646,3.531 77.394,3.28 77.394,1.476 77.622,1.248 81.687,1.248 81.942,1.503 81.942,3.405 81.816,3.531
  region net GND: 64.057,10.336 63.805,10.084 63.805,8.28 64.033,8.052 68.098,8.052 68.353,8.307 68.353,10.21 68.227,10.336
  region net NetC1_1: 81.365,11.465 81.365,7.358 82.323,6.401 88.341,6.401 88.646,6.706 88.646,10.414 88.367,10.693 83.998,10.693 83.439,11.252 83.439,11.608 83.16,11.887 81.788,11.887
  region net GND: 77.267,11.303 77.089,11.125 77.089,7.112 77.343,6.858 79.375,6.858 79.629,7.112 79.629,11.074 79.4,11.303
  region net GND: 89.306,7.493 89.56,7.239 91.846,7.239 93.447,8.839 96.613,8.839 96.952,9.178 96.952,9.83 96.749,10.033 89.662,10.033 89.306,9.677
  region net GND: 89.383,3.048 89.205,2.87 89.205,1.168 89.51,0.864 92.227,0.864 92.532,1.168 92.532,1.422 90.907,3.048
  region net VCC12V: 88.646,1.905 88.341,1.6 82.702,1.6 82.194,2.108 82.194,3.429 81.204,4.42 77.521,4.42 76.81,5.131 73.736,5.131 73.406,5.461 73.406,6.477 73.076,6.807 70.002,6.807 69.85,6.96 69.85,7.722 69.952,7.823 73.177,7.823 73.457,8.103 73.457,10.998 73.685,11.227 76.505,11.227 76.81,10.922 76.81,7.061 77.191,6.68 81.483,6.68 82.093,6.071 88.417,6.071 88.646,5.842
  region net SumGND: 89.687,6.883 89.306,6.502 89.306,3.531 89.586,3.251 90.957,3.251 92.735,1.473 96.461,1.473 98.704,3.717 98.704,9.804 98.476,10.033 97.282,10.033 97.104,9.855 97.104,9.093 96.545,8.534 93.548,8.534 91.897,6.883
  region net VBUS: 3.5,63.5 0.102,60.102 0.102,53.797 0.544,53.355 14.645,53.355 15.106,53.815 15.106,62.923 14.529,63.5
  region net Motor-U: 35.255,45.644 36,44.899 36,41.309 34.315,39.624 34.315,33.68 32.461,31.826 20.422,31.826 18.364,33.884 18.364,43.129 20.879,45.644
  region net VCC12V: 75.567,26.619 75.389,26.441 75.389,25.349 75.567,25.171 80.774,25.171 81.079,24.867 81.079,22.504 81.231,22.352 82.247,22.352 82.4,22.504 82.4,26.162 82.171,26.391 79.25,26.391 79.022,26.619
  region net VCC12V: 42.926,26.619 42.748,26.441 42.748,25.349 42.926,25.171 48.133,25.171 48.438,24.867 48.438,22.504 48.59,22.352 49.606,22.352 49.759,22.504 49.759,26.162 49.454,26.467 46.533,26.467 46.38,26.619
  region net VCC12V: 10.363,26.619 10.185,26.441 10.185,25.349 10.363,25.171 15.57,25.171 15.875,24.867 15.875,22.504 16.027,22.352 17.043,22.352 17.196,22.504 17.196,26.162 16.916,26.441 13.995,26.441 13.818,26.619
  region net VCC5V: 63.805,11.125 64.033,10.897 72.822,10.897 73.508,11.582 74.955,11.582 75.311,11.938 75.311,14.199 75.057,14.453 73.228,14.453 72.466,13.691 64.059,13.691 63.805,13.437
  region net VBUS: 93.091,63.754 91.11,61.773 91.11,56.515 93.421,54.204 93.421,16.307 91.719,14.605 87.02,14.605 86.817,14.402 86.817,12.548 86.995,12.37 93.218,12.37 94.209,13.36 98.755,13.36 99.492,14.097 99.492,61.646 97.384,63.754
Top Layer:
  region net PGND: 0.533,11.659 0.102,11.227 0.102,4.801 3.404,1.499 11.125,1.499 12.217,2.591 12.217,6.121 15.101,9.005 15.101,11.225 14.668,11.659
  region net VBUS: 3.506,63.5 0.108,60.102 0.108,53.797 0.551,53.354 14.651,53.354 15.112,53.815 15.112,62.923 14.535,63.5
  region net Motor-W: 77.902,45.618 77.159,44.875 77.159,41.332 77.876,40.615 81.915,40.615 83.693,38.837 83.693,32.944 84.811,31.826 90.881,31.826 91.872,32.817 91.872,44.323 90.576,45.618
  region net Motor-V: 50.876,32.537 51.587,31.826 60.833,31.826 61.392,32.385 61.392,44.526 60.3,45.618 51.892,45.618 50.876,44.602
  region net Motor-U: 35.255,45.644 36,44.899 36,41.309 34.315,39.624 34.315,33.68 32.461,31.826 20.422,31.826 18.364,33.884 18.364,43.129 20.879,45.644
Bottom Layer:
  region net PGND: 0.533,11.659 0.102,11.227 0.102,4.801 3.404,1.499 11.125,1.499 12.217,2.591 12.217,6.121 15.101,9.005 15.101,11.225 14.668,11.659
  region net VBUS: 3.506,63.5 0.108,60.102 0.108,53.797 0.551,53.354 14.651,53.354 15.112,53.815 15.112,62.923 14.535,63.5
  region net Motor-W: 77.902,45.618 77.159,44.875 77.159,41.332 77.876,40.615 81.915,40.615 83.693,38.837 83.693,32.944 84.811,31.826 90.881,31.826 91.872,32.817 91.872,44.323 90.576,45.618
  region net Motor-V: 50.876,32.537 51.587,31.826 60.833,31.826 61.392,32.385 61.392,44.526 60.3,45.618 51.892,45.618 50.876,44.602
  region net Motor-U: 35.255,45.644 36,44.899 36,41.309 34.315,39.624 34.315,33.68 32.461,31.826 20.422,31.826 18.364,33.884 18.364,43.129 20.879,45.644
Bottom Layer 1:
  region net PGND: 0.533,11.659 0.102,11.227 0.102,4.801 3.404,1.499 11.125,1.499 12.217,2.591 12.217,6.121 15.101,9.005 15.101,11.225 14.668,11.659
  region net VBUS: 3.5,63.5 0.102,60.102 0.102,53.797 0.544,53.355 14.645,53.355 15.106,53.815 15.106,62.923 14.529,63.5
  region net Motor-W: 77.902,45.618 77.159,44.875 77.159,41.332 77.876,40.615 81.915,40.615 83.693,38.837 83.693,32.944 84.811,31.826 90.881,31.826 91.872,32.817 91.872,44.323 90.576,45.618
  region net Motor-V: 50.876,32.537 51.587,31.826 60.833,31.826 61.392,32.385 61.392,44.526 60.3,45.618 51.892,45.618 50.876,44.602
  region net Motor-U: 35.255,45.644 36,44.899 36,41.309 34.315,39.624 34.315,33.68 32.461,31.826 20.422,31.826 18.364,33.884 18.364,43.129 20.879,45.644

## Silkscreen, mask and mechanical layers (free items; w line width, h text height)
Top Overlay:
  text "U" at 21.422,58.963 h5
  text "V" at 46.422,58.963 h5
  text "VBUS" at 26.802,46.72 h1.6 r90
  text "misaka10039" at 70.947,43.785 h1.6 r90
  text "W" at 72.298,43.723 h5
  text "Ver0.1" at 63.962,40.788 h1.6 r90
  text "ControllerBoard" at 66.299,40.762 h1.6 r90
  text "2025/10/25" at 68.788,40.711 h1.6 r90
  text "PGND" at 26.802,12.416 h1.6 r90
  text "UART4_RX" at 45.563,6.343 h0.8 r90
  text "UART4_TX" at 46.883,6.343 h0.8 r90
  text "CSn" at 31.651,6.297 h0.8 r90
  text "VCC" at 28.983,6.267 h0.8 r90
  text "GND" at 30.304,6.267 h0.8 r90
  text "VCC" at 39.778,6.267 h0.8 r90
  text "GND" at 41.099,6.267 h0.8 r90
  text "VCC" at 13.16,6.221 h0.8 r90
  text "GND" at 14.48,6.221 h0.8 r90
  text "RS485_B" at 20.773,4.951 h0.8 r90
  text "MISO" at 33.048,4.951 h0.8 r90
  text "MOSI" at 35.258,4.951 h0.8 r90
  text "RS485_A" at 19.326,4.925 h0.8 r90
  text "SCK" at 34.165,4.925 h0.8 r90
  text "DIO" at 52.961,4.239 h0.8 r90
  text "CLK" at 51.895,4.112 h0.8 r90
  text "NRST" at 54.028,3.376 h0.8 r90
Top Solder:
  lines w1.016: 19,40 24,45 ; 19,42 22,45 ; 21,40 26,45 ; 23,40 28,45 ; 25,40 28,43 ; 26,33 33,40 ; 26,37 29,40 ; 27,36 31,40 ; 27,40 28,41 ; 28,33 34,39 ; 30,33 34,37 ; 32,33 34,35 ; 52,39 53,40 ; 52,41 53,42 ; 52,43 53,44 ; 54,39 55,40 ; 56,39 57,40 ; 58,33 61,36 ; 58,35 61,38 ; 58,37 61,40 ; 58,39 59,40 ; 60,33 61,34 ; 85,41 87,39 ; 85,43 90,38 91,37 ; 85,45 91,39 ; 89,45 91,43 ; 91,41 87,45 ; 28,43 28,43 ; 29,40 29,40 ; 33,40 33,40 ; 53,40 53,40 ; 55,40 55,40 ; 57,40 57,40 ; 61,34 61,34 ; 61,38 61,38 ; 87,45 87,45
Bottom Solder:
  lines w1.016: 19,40 24,45 ; 19,42 22,45 ; 21,40 26,45 ; 23,40 28,45 ; 25,40 28,43 ; 27,34 28,33 ; 27,38 32,33 ; 27,40 28,41 ; 28,39 33,34 ; 30,33 25,38 ; 31,40 34,37 ; 34,35 29,40 ; 34,39 33,40 ; 52,41 54,43 ; 52,43 54,45 ; 54,39 55,40 ; 54,41 52,39 ; 56,39 57,40 ; 58,33 61,36 ; 58,35 61,38 ; 58,37 61,40 ; 58,39 59,40 ; 60,33 61,34 ; 85,41 87,39 ; 85,43 91,37 ; 85,45 91,39 ; 89,45 91,43 ; 91,33 91,35 ; 91,41 87,45 ; 25,38 25,38 ; 28,43 28,43 ; 29,40 29,40 ; 33,40 33,40 ; 52,39 52,39 ; 54,45 54,45 ; 55,40 55,40 ; 57,40 57,40 ; 61,34 61,34 ; 61,38 61,38 ; 87,45 87,45
Mechanical 1:
  circle w0.013: c94.994,60 r3.5
  circle w0.013: c94.994,5 r3.5
  circle w0.013: c4.994,5 r3.5
  circle w0.013: c4.994,60 r3.5
  lines w0.013: 14.018,18.86 0.349,18.86 0.349,18.86 0.02,19.19 0.006,19.204 0.006,45.774 0.1,45.867 0.361,46.129 0.396,46.164 13.933,46.164 13.956,46.14 14.208,45.889 15.226,45.889 19.202,45.889 19.202,46.164 19.202,53.389 14.242,53.389 14.03,53.176 14.018,53.164 ; 14.018,18.86 14.03,18.872 14.242,19.085 19.202,19.085 19.202,11.86 19.202,11.585 15.226,11.585 14.208,11.585 13.956,11.836 13.933,11.86 0.396,11.86 0.361,11.825 0.1,11.563 0.006,11.47 0.006,10.738 0.006,5 ccw(c4.994,5) 4.994,0.013 94.994,0.013 ccw(c94.994,5) 99.981,5 99.981,60 ccw(c94.994,60) 94.994,64.987 84.482,64.987 ; 14.018,53.164 0.349,53.164 0.349,53.164 0.02,53.494 0.006,53.508 0.006,55.016 0.006,55.023 0.006,60 cw(c4.994,60) 4.994,64.987 4.995,64.987 5.01,64.987 5.472,64.987 28.645,64.987 28.727,64.906 28.988,64.645 29.023,64.609 29.023,51.073 29,51.049 28.748,50.798 28.748,49.78 28.748,45.804 29.023,45.804 36.248,45.804 36.248,50.763 36.036,50.976 36.024,50.987 36.023,64.656 ; 61.024,50.988 61.024,64.656 61.024,64.656 61.354,64.986 76.776,64.986 76.855,64.906 77.117,64.645 77.152,64.609 77.152,51.073 77.128,51.049 76.877,50.798 76.877,49.78 76.877,45.804 77.152,45.804 84.377,45.804 84.377,50.763 84.164,50.976 84.152,50.987 ; 61.024,50.987 61.036,50.976 61.249,50.763 61.249,45.804 54.024,45.804 53.749,45.804 53.749,49.78 53.749,50.798 54,51.049 54.024,51.073 54.024,64.609 53.989,64.645 53.727,64.906 53.648,64.986 36.353,64.986 36.024,64.656 ; 84.152,50.988 84.152,64.656 84.152,64.656 84.482,64.986 ; 36.023,64.656 36.024,64.656 ; 4.801,22.479 4.801,42.545 6.02,42.545 6.02,22.479 4.801,22.479 ; 37.49,22.479 38.71,22.479 38.71,42.545 37.49,42.545 37.49,22.479 ; 70.155,22.479 71.374,22.479 71.374,42.545 70.155,42.545 70.155,22.479